# EAGLE board greenhousectrl-latest-shrunkenHBridge (EAGLE 7.7.0)
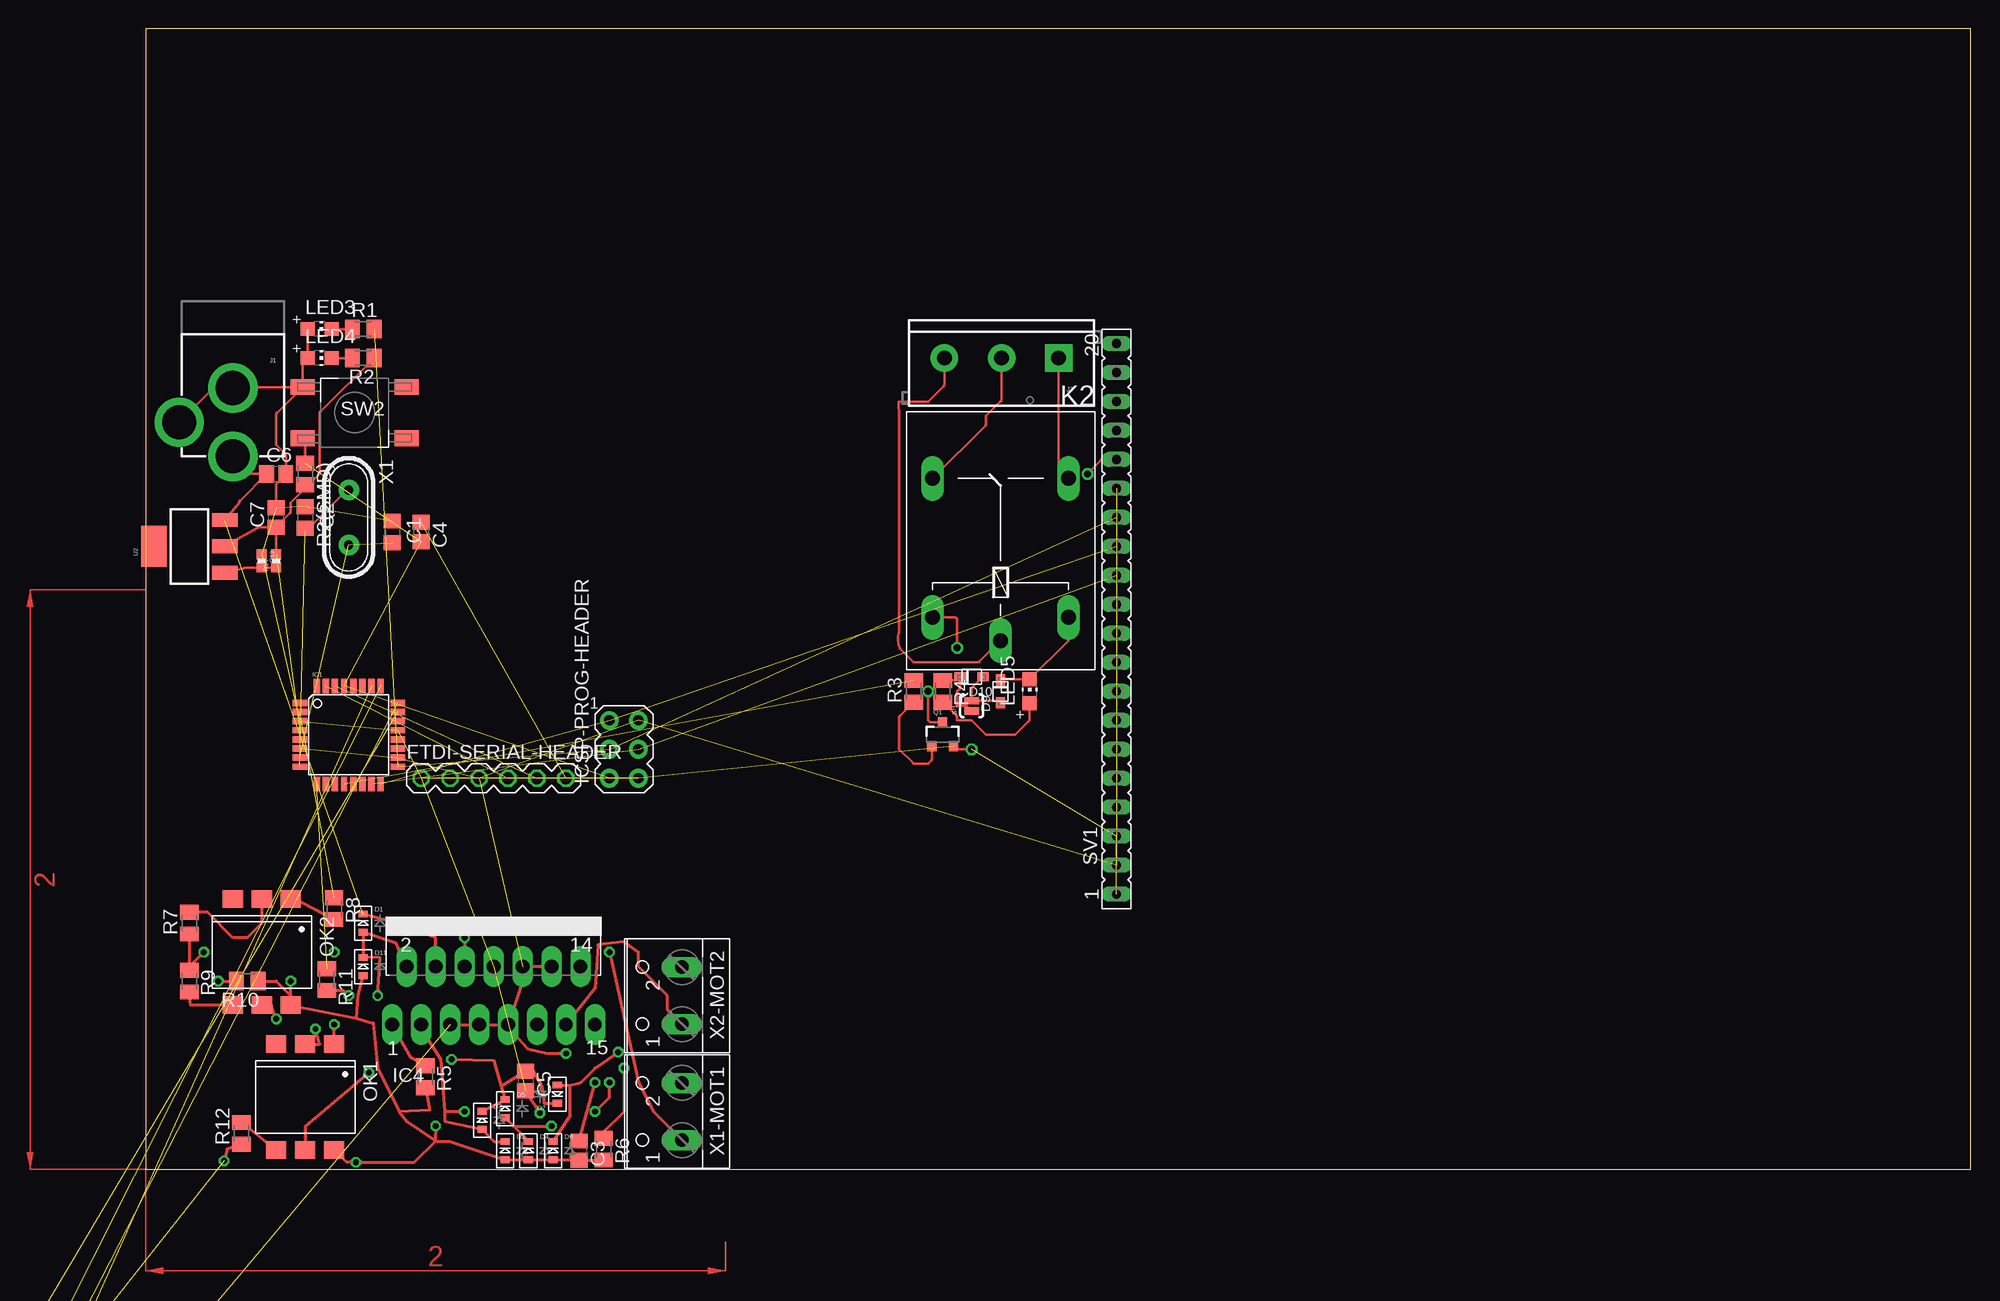
[diagram p0: board, top side]
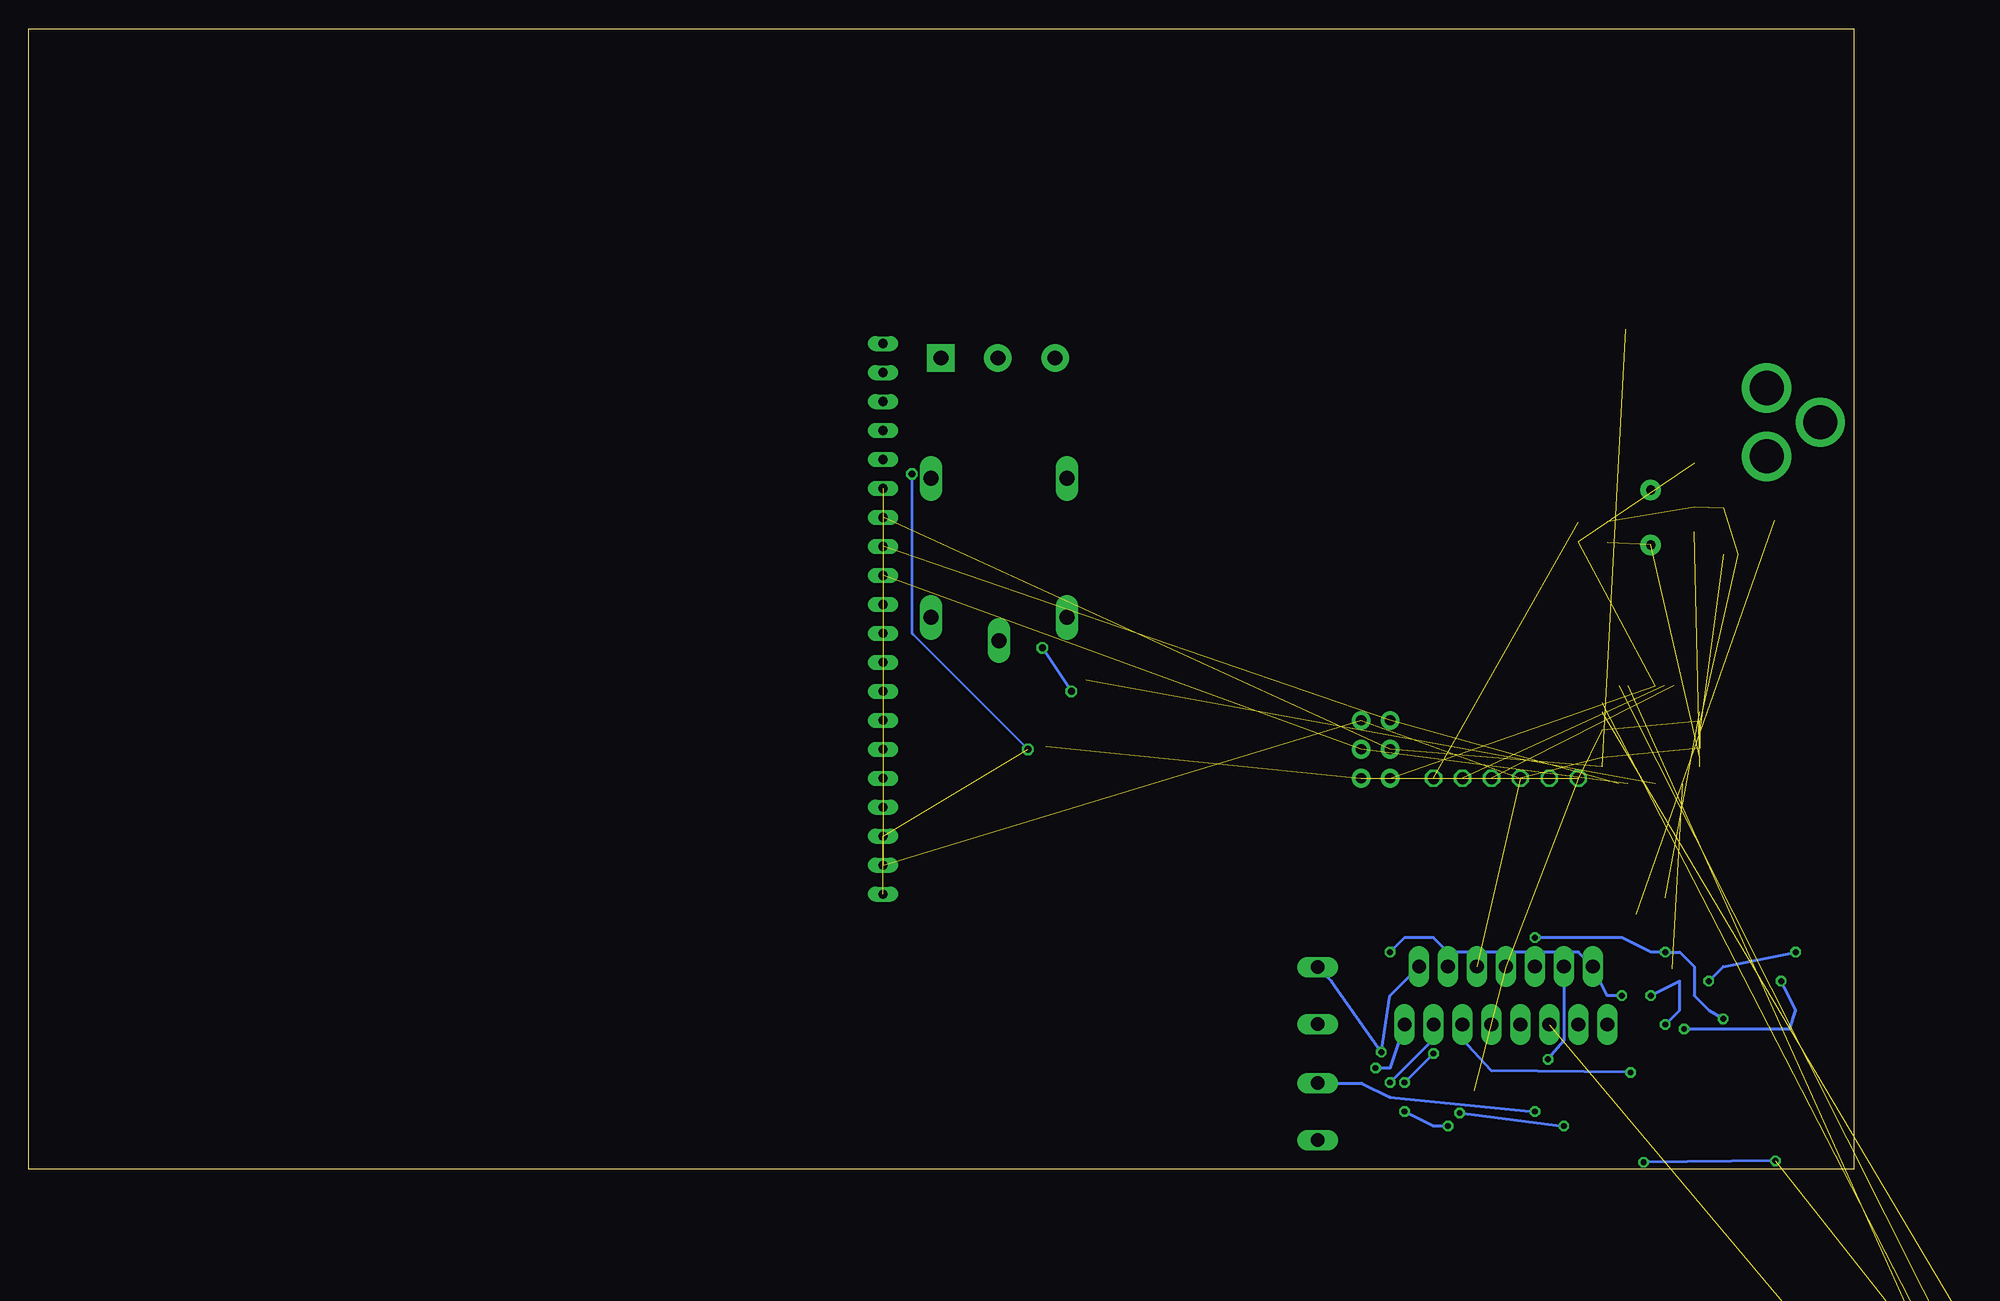
[diagram p1: board, bottom side, seen from below]

Size 160 x 100 mm. Coordinates in mm from the lower left corner, seen from the top.
Outline: 0,0 160,0 160,100 0,100 0,0
Copper layers (1*16): Top 0.035mm / dielectric 1.5mm / Bottom 0.035mm
Design rules "default": minimum track width 10mil, minimum drill 24mil, track to track 8mil, track to pad 8mil, pad to pad 8mil, via to via 8mil, smd to smd 8mil, copper to edge 40mil, drill to drill 8mil, minimum pad ring 10mil, minimum via ring 8mil, stop-mask expansion 4mil, vias tented up to drill 0mil, thermal gap 10mil

## Footprints (pad centres in the part's own frame; a part is rotated, then mirrored left to right if it is on the bottom)
C0805 = smd 1.3 x 1.5: 1 -0.95,0; 2 0.95,0
C0805' = smd 1.3 x 1.5: 1 -0.85,0; 2 0.85,0
SOD-523 = smd 0.8 x 0.6: A 0,-0.8; K 0,0.8
SOD-323F = smd 1 x 0.8: A -1,0; C 1,0
06X1-PTH = drill 1.016 octagon: 1 -6.35,0; 2 -3.81,0; 3 -1.27,0; 4 1.27,0; 5 3.81,0; 6 6.35,0
TQFP32-08 = smd 1.27 x 0.559: 1 -4.293,2.8; 2 -4.293,2; 3 -4.293,1.2; 4 -4.293,0.4; 5 -4.293,-0.4; 6 -4.293,-1.2; 7 -4.293,-2; 8 -4.293,-2.8; 17 4.293,-2.8; 18 4.293,-2; 19 4.293,-1.2; 20 4.293,-0.4; 21 4.293,0.4; 22 4.293,1.2; 23 4.293,2; 24 4.293,2.8 | smd 0.559 x 1.27: 9 -2.8,-4.293; 10 -2,-4.293; 11 -1.2,-4.293; 12 -0.4,-4.293; 13 0.4,-4.293; 14 1.2,-4.293; 15 2,-4.293; 16 2.8,-4.293; 25 2.8,4.293; 26 2,4.293; 27 1.2,4.293; 28 0.4,4.293; 29 -0.4,4.293; 30 -1.2,4.293; 31 -2,4.293; 32 -2.8,4.293
MULTIWATT-15 = drill 1.2 long: 1 -8.89,-7.62; 2 -7.62,-2.54; 3 -6.35,-7.62; 4 -5.08,-2.54; 5 -3.81,-7.62; 6 -2.54,-2.54; 7 -1.27,-7.62; 8 0,-2.54; 9 1.27,-7.62; 10 2.54,-2.54; 11 3.81,-7.62; 12 5.08,-2.54; 13 6.35,-7.62; 14 7.62,-2.54; 15 8.89,-7.62
AVRISP = drill 0.9 pad 1.626: 1 -1.27,2.54; 2 1.27,2.54; 3 -1.27,0; 4 1.27,0; 5 -1.27,-2.54; 6 1.27,-2.54
POWER_JACK_PTH = drill 2.997 pad 4.318: GND 0,7.7; GNDBREAK 4.7,10.7; PWR 0,13.7
SCREWTERMINAL-5MM-3 = drill 1.3 pad 2.413 square: 1 0,0 | drill 1.3 pad 2.413: 2 5,0; 3 10,0
PAD-JUMPER-2-NO_YES_SILK = smd 0.635 x 1.27: 1 -0.45,0; 2 0.45,0
G5LE = drill 1.321 long: 1 -7.493,-5.969; 2 -7.493,5.969; O 4.699,5.969; P -9.525,0; S 4.699,-5.969
CHIP-LED0805 = smd 1.2 x 1.2: A 0,-1.05; C 0,1.05
DIL6-SMD = smd 1.78 x 1.52: 1 -2.54,-4.645; 2 0,-4.645; 3 2.54,-4.645; 4 2.54,4.645; 5 0,4.645; 6 -2.54,4.645
SOT23-3 = smd 0.8 x 0.9: 1 -0.95,-1; 2 0.95,-1; 3 0,1.1
M0805 = smd 1.3 x 1.6: 1 -0.95,0; 2 0.95,0
0402-RES = smd 0.85 x 0.9: 1 -0.58,0; 2 0.58,0
FE20 = drill 0.813 long: 1 -24.13,0; 2 -21.59,0; 3 -19.05,0; 4 -16.51,0; 5 -13.97,0; 6 -11.43,0; 7 -8.89,0; 8 -6.35,0; 9 -3.81,0; 10 -1.27,0; 11 1.27,0; 12 3.81,0; 13 6.35,0; 14 8.89,0; 15 11.43,0; 16 13.97,0; 17 16.51,0; 18 19.05,0; 19 21.59,0; 20 24.13,0
SPST_NO_SMD = smd 2.108 x 1.397: 1 0,4.496; 2 9.119,4.496; 3 0,0; 4 9.119,0
SOT223 = smd 1.219 x 2.235: 1 -2.311,-3.099; 2 0,-3.099; 3 2.311,-3.099 | smd 3.6 x 2.2: 4 0,3.099
HC49 = drill 0.813 pad 1.8: 1 -2.413,0; 2 2.413,0
W237-102 = drill 1.194 long: 1 -2.5,-1.27; 2 2.5,-1.27
W237-103 = drill 1.194 long: 1 -5,-1.29; 2 0,-1.29; 3 5,-1.29

## Placement (x,y rotation side)
C1  [C0805]  21.59,55.88 270 top
C2  [C0805]  13.97,57.15 270 top
C3  1.0uF  [C0805']  37.97,1.65 270 top
C4  0.1uF  [C0805']  24.13,55.88 270 top
C5  1.0uF  [C0805']  33.27,7.75 270 top
C6  0.1uF  [C0805']  11.43,60.96 0 top
C7  0.1uF  [C0805']  11.43,57.15 90 top
D1  [SOD-523]  19.05,21.59 0 top
D2  [SOD-523]  31.5,1.65 0 top
D3  [SOD-523]  29.46,4.32 0 top
D4  [SOD-523]  33.53,1.65 0 top
D5  [SOD-523]  31.5,5.33 0 top
D6  [SOD-523]  35.69,1.65 0 top
D7  [SOD-523]  36.07,6.6 180 top
D9  1N4148  [SOD-323F]  74.93,41.91 90 top
D10  Zener  [SOD-323F]  72.39,43.18 180 top
D11  [SOD-523]  19.05,17.78 0 top
FTDI-SERIAL-HEADER  HEADER-06X1-MALE  [06X1-PTH]  30.48,34.29 0 top
IC1  ATMEGA168TQFP-08  [TQFP32-08]  17.78,38.1 0 top
IC4  L298  [MULTIWATT-15]  30.48,20.32 0 top
ICSP-PROG-HEADER  AVRISP-6  [AVRISP]  41.91,36.83 0 top
J1  POWER_JACKPTH  [POWER_JACK_PTH]  7.62,76.2 180 top
J3  [SCREWTERMINAL-5MM-3]  80.01,71.12 180 top
JP1  JUMPER-PAD-2-NOYES_SILK  [PAD-JUMPER-2-NO_YES_SILK]  72.39,40.64 90 top
K2  G5LE  [G5LE]  74.93,55.88 90 top
LED3  [CHIP-LED0805]  15.24,73.66 270 top
LED4  [CHIP-LED0805]  15.24,71.12 270 top
LED5  [CHIP-LED0805]  77.47,41.91 0 top
OK1  4N27SM  [DIL6-SMD]  13.97,6.35 180 top
OK2  4N27SM  [DIL6-SMD]  10.16,19.05 180 top
Q1  MMBT2222A  [SOT23-3]  69.85,38.1 0 top
R1  [M0805]  19.05,73.66 0 top
R2  [M0805]  19.05,71.12 180 top
R2(SMD)  [M0805]  13.97,60.96 270 top
R3  1K  [M0805]  67.31,41.91 90 top
R4  1K  [M0805]  69.85,41.91 270 top
R5  [M0805]  24.51,8.13 270 top
R6  [M0805]  40.13,1.78 270 top
R7  [M0805]  3.81,21.59 90 top
R8  [M0805]  16.51,22.86 270 top
R9  [M0805]  3.81,16.51 270 top
R10  [M0805]  8.89,16.51 180 top
R11  [M0805]  15.88,16.64 270 top
R12  [M0805]  8.38,3.17 90 top
R13  [0402-RES]  10.16,53.34 270 top
R14  [0402-RES]  11.43,53.34 90 top
SV1  [FE20]  85.09,48.26 90 top
SW2  MOMENTARYBUTTON  [SPST_NO_SMD]  22.86,68.58 180 top
U2  V_REG_317SMD  [SOT223]  3.81,54.61 90 top
X1  CRYSTALS-NOGND-HC49  [HC49]  17.78,57.15 270 top
X1-MOT1  [W237-102]  45.72,5.08 90 top
X2  [W237-103]  -60.96,-90.17 0 top  (outside the outline)
X2-MOT2  [W237-102]  45.72,15.24 90 top
X3  [W237-103]  -60.96,-109.22 0 top  (outside the outline)
X4  [W237-103]  -60.96,-128.27 0 top  (outside the outline)
X5  [W237-103]  -60.96,-147.32 0 top  (outside the outline)

## Library data of the parts
C1 C2 = resistor
C3-C7 D1-D7 D10 D11 ICSP-PROG-HEADER LED3-LED5 R1 R2 R2(SMD) R3-R12 = adafruit
D9 = adafruit; PROD_ID: DIO-08378
FTDI-SERIAL-HEADER = GeekAmmo; OTHER: 4UCON 00834; URL: http://www.4uconnector.com/online/SearchPro.asp?FormName=ProSearch&FormAction=search&s_GroupNo=&s_keyword=00834
IC1 = atmega328p
IC4 = st-microelectronics; MPN: L298N; OC_FARNELL: 1589425; OC_NEWARK: 32M1527
J1 = SparkFun-Connectors; PROD_ID: CONN-08197
J3 = SparkFun-Connectors; PROD_ID: CONN-10134; STOREFRONT_ID: PRT-08433
JP1 = SparkFun-Passives
K2 = relay; OC_FARNELL: unknown; OC_NEWARK: unknown
OK1 OK2 = optocoupler; MF: FAIRCHILD SEMICONDUCTOR; MPN: 4N27S-M; OC_FARNELL: unknown; OC_NEWARK: 05C3300
Q1 = SparkFun-DiscreteSemi; PROD_ID: TRANS-08049
R13 R14 = SparkFun-Resistors
SV1 = con-lsta; OC_FARNELL: unknown; OC_NEWARK: unknown
SW2 = ece388
U2 = SparkFun-PowerIC
X1 = IQD-Frequency-Products
X1-MOT1 X2-MOT2 = con-wago-500; MPN: 237-102; OC_FARNELL: unknown; OC_NEWARK: 70K9898
X2-X5 = ece388; MPN: 237-103; OC_FARNELL: unknown; OC_NEWARK: 18M7116

## Nets
+5V: C3.1 C7.1 FTDI-SERIAL-HEADER.3 IC1.4 IC1.6 IC1.18 IC4.5 IC4.7 IC4.9 IC4.10 IC4.12 ICSP-PROG-HEADER.2 R2(SMD).2 R2.1 R14.2 SV1.2 SV1.15 U2.2 X2.2 X3.2 X4.2 X5.2
+12V: C5.1 C6.1 D1.K D3.K D5.K D7.K IC4.4 J1.PWR U2.3
ADC4: SV1.4
ADC5: SV1.5
COIL: D10.C JP1.1 K2.2 Q1.3 R4.1
COMMON: J3.3 K2.P
CTS(DOESNTEXIST): FTDI-SERIAL-HEADER.2
DIODENODE: D9.A D10.A JP1.2
DTR: C4.1 FTDI-SERIAL-HEADER.6
ENA: IC4.6 OK2.5
ENB: IC4.11 OK1.5
GND: C1.1 C2.1 C3.2 C5.2 C6.2 C7.2 D2.A D4.A D6.A D11.A FTDI-SERIAL-HEADER.1 IC1.3 IC1.5 IC1.21 IC4.8 ICSP-PROG-HEADER.6 J1.GND J1.GNDBREAK LED3.A LED4.A OK1.6 OK2.6 Q1.2 R5.2 R6.2 R7.1 R9.1 R10.1 R12.1 R13.1 SV1.1 SV1.3 SV1.16 SW2.4 X2.1 X3.1 X4.3 X5.3
MISO: IC1.16 ICSP-PROG-HEADER.1 SV1.13
MOSI: IC1.15 ICSP-PROG-HEADER.4 SV1.12
N$1: OK2.1 R8.2
N$2: LED4.C R2.2
N$3: LED5.A R4.2
N$4: OK2.2 R7.2
N$5: OK2.4 R9.2
N$6: Q1.1 R3.1
N$7: R13.2 R14.1 U2.1
N$8: OK1.1 R11.2
N$9: OK1.2 R10.2
N$10: LED3.C R1.1
N$11: C1.2 IC1.7 X1.2
N$13: C2.2 IC1.8 X1.1
N$15: OK1.4 R12.2
NC: J3.1 K2.S
NO: J3.2 K2.O
OUT1: D1.A D11.K IC4.2 X1-MOT1.1
OUT2: D2.K D3.A IC4.3 X1-MOT1.2
OUT3: D4.K D5.A IC4.13 X2-MOT2.1
OUT4: D6.K D7.A IC4.14 X2-MOT2.2
PB0: IC1.12 R3.2
PB1: IC1.13
PB2: IC1.14
PC0: IC1.23 X2.3
PC1: IC1.24 X3.3
PC2: IC1.25 X4.1
PC3: IC1.26 X5.1
PC4: IC1.27
PC5: IC1.28
PD2: IC1.32
PD3: IC1.1
PD4: IC1.2 R8.1
PD5: IC1.9 R11.1
PD6: IC1.10
PD7: IC1.11
RST: C4.2 IC1.29 ICSP-PROG-HEADER.5 R2(SMD).1 SW2.2
RX: FTDI-SERIAL-HEADER.5 IC1.30
SCK: IC1.17 ICSP-PROG-HEADER.3 R1.2 SV1.14
SEN_A: IC4.1 R5.1
SEN_B: IC4.15 R6.1
SS: SV1.11
TX: FTDI-SERIAL-HEADER.4 IC1.31
VCC: D9.C K2.1 LED5.C

## Tracks (layer width: path | path; a pad name or v marks a point on that pad's centre or on a via)
+5V  (via drill 0.51)  (12 unrouted)
  Top 0.203: U2.2 9.79,56.23 arc-45 9.97,56.3 C7.1 | C7.1 12.63,57.5 arc45 12.7,57.67 12.7,58.42 13.9,59.62 arc45 13.97,59.8 R2(SMD).2 14.19,60.01 arc45 14.36,60.08 15.24,60.96 15.24,66.25 arc-45 15.31,66.43 R2.1 | C7.1 R14.2
  Top 0.254: C3.1 v39.37,7.62 | v36.83,10.16 35.18,10.16 33.53,10.54 32.26,11.94 IC4.9 | IC4.9 33.02,16.51 IC4.10 IC4.12 | IC4.9 IC4.7 IC4.5
  Bottom 0.254: v39.37,7.62 v36.83,10.16
+12V  (via drill 0.51)  (1 unrouted)
  Top 0.203: J1.PWR 9.09,61.03 arc45 9.27,60.96 C6.1 8.25,58.63 arc45 8.18,58.45 U2.3
  Top 0.254: IC4.4 25.4,20.32 22.06,21.59 D1.K | v26.8,9.65 30.48,9.56 31.11,7.43 | 31.11,7.43 D5.K D3.K | D7.K 34.92,5.8 34.67,7.37 33.95,8.64 C5.1 31.22,7.33 31.11,7.43
  Bottom 0.254: IC4.4 25.4,11.3 v26.8,9.65
COIL  (via drill 0.6)
  Top 0.203: K2.2 70.89,48.39 arc-45 71.07,48.31 71.12,48.26 v71.12,45.72 | v68.58,41.91 68.8,41.91 | 68.8,41.91 arc45 68.97,41.98 R4.1 70.97,42.86 arc45 71.14,42.93 D10.C 71.39,42.28 arc-45 71.32,42.11 71.12,41.91 71.12,40.64 71.83,40.64 arc-45 72.01,40.57 JP1.1 | 68.8,41.91 68.65,41.77 arc45 68.58,41.59 68.58,39.37 68.68,39.27 arc45 68.86,39.2 Q1.3
  Bottom 0.203: v71.12,45.72 v68.58,41.91
COMMON
  Top 0.203: J3.3 70.01,68.84 arc-45 69.94,68.67 68.58,67.31 66.14,67.31 arc45 65.97,67.24 66.04,66.04 66.04,47.09 arc45 66.11,45.65 67.31,44.45 72.92,44.45 arc45 73.1,44.52 K2.P
DIODENODE
  Top 0.203: D9.A 74.82,41.02 arc45 74.64,41.09 JP1.2 72.39,42.08 arc-45 72.46,42.25 D10.A
DTR  (1 unrouted)
ENA  (via drill 0.51)
  Top 0.254: v27.94,20.32 IC4.6 | v11.43,13.21 10.99,14.4 OK2.5
  Bottom 0.254: v27.94,20.32 20.32,20.32 17.78,19.05 v16.51,19.05 15.24,19.05 13.97,17.78 13.97,15.24 12.7,13.97 v11.43,13.21
ENB  (via drill 0.51)
  Top 0.254: v19.56,8.51 13.97,3.81 OK1.5
  Bottom 0.254: v19.56,8.51 31.75,8.64 34.29,11.43 IC4.11
GND  (via drill 0.51, 0.6)  (17 unrouted)
  Top 0.203: Q1.2 71,36.9 arc45 71.17,36.83 v72.39,36.83 | v82.55,60.96 83.75,62.16 arc-45 83.92,62.23 SV1.16 | C7.2 11.43,60.01 arc-45 11.5,60.18 C6.2 12.28,62.55 arc45 12.21,62.72 11.43,63.5 11.43,66.16 arc-45 11.5,66.34 SW2.4 | J1.GNDBREAK 5.85,68.43 arc-45 6.03,68.5 J1.GND J1.GND arc-45 7.8,68.58 SW2.4 | LED3.A LED4.A 13.82,70.75 arc45 13.74,70.57 SW2.4
  Top 0.254: R7.1 3.81,17.78 | 3.81,17.78 R9.1 | 22.22,5.07 20.32,8.89 19.94,12.83 18.49,13.26 | 22.22,5.07 22.9,4.19 25.34,2.5 | 25.34,2.5 25.4,2.5 | 25.4,2.5 26.64,2.46 D2.A D4.A D6.A 37.92,0.85 C3.2 40.1,0.8 R6.2 | 18.49,13.26 OK2.6 12.7,15.24 | 18.49,13.26 18.61,15.28 D11.A | 12.7,15.24 v12.7,16.51 | v5.08,19.05 3.81,17.78 | C5.2 33.66,6.35 v34.54,4.95 | R5.2 24.89,5.2 22.22,5.07 | v25.4,3.81 25.38,3.81 25.34,2.5 | R12.1 7.11,1.78 v6.86,0.76 | OK1.6 17.58,0.64 v18.41,0.64 23.54,0.64 25.4,2.5 | R10.1 11.43,16.51 12.7,15.24
  Bottom 0.203: v72.39,36.83 82.48,46.92 arc45 82.55,47.09 v82.55,60.96
  Bottom 0.254: v12.7,16.51 11.43,17.78 v5.08,19.05 | v34.54,4.95 v25.4,3.81 | v6.86,0.76 v18.41,0.64
MISO  (2 unrouted)
MOSI  (2 unrouted)
N$1
  Top 0.254: R8.2 12.81,23.81 OK2.1
N$2
  Top 0.203: LED4.C R2.2
N$3
  Top 0.203: R4.2 71.05,39.76 arc-45 71.12,39.59 71.12,39.37 72.39,39.37 73.66,38.1 76.2,38.1 77.4,39.3 arc45 77.47,39.48 LED5.A
N$4
  Top 0.254: OK2.2 10.16,21.59 8.89,20.32 7.62,20.32 5.4,22.54 R7.2
N$5
  Top 0.254: OK2.4 3.92,14.4 R9.2
N$6
  Top 0.203: R3.1 66.11,39.76 arc45 66.04,39.59 66.04,36.83 67.24,35.63 arc45 67.42,35.56 68.58,35.56 68.83,35.81 arc45 68.9,35.98 Q1.1
N$7
  Top 0.203: U2.1 8.57,52.69 arc-45 8.74,52.76 R13.2 R14.1
N$8  (via drill 0.51)
  Top 0.254: OK1.1 v16.51,12.7 | v17.78,15.24 17.33,15.69 R11.2
  Bottom 0.254: v16.51,12.7 15.24,13.97 15.24,16.51 v17.78,15.24
N$9  (via drill 0.51)
  Top 0.203: R10.2 7.69,16.26 arc45 7.62,16.09
  Top 0.254: OK1.2 15.24,10.99 v14.86,12.32 | v6.35,16.51 R10.2
  Bottom 0.254: v14.86,12.32 5.59,12.32 5.08,13.97 v6.35,16.51
N$10
  Top 0.203: LED3.C R1.1
N$11  (2 unrouted)
N$13  (1 unrouted)
  Top 0.203: C2.2 13.97,55.88 17.58,59.49 arc-45 17.76,59.56 X1.1
N$15
  Top 0.203: OK1.4 R12.2
NC
  Top 0.203: J3.1 80.01,61.57 arc45 80.08,61.39 K2.S
NO
  Top 0.203: J3.2 75.01,67.5 arc-45 74.94,67.32 73.66,66.04 73.66,65.38 arc-45 73.59,65.2 K2.O
OUT1  (via drill 0.51)
  Top 0.254: IC4.2 21.93,19.81 D1.A D11.K 20.54,18.54 v20.32,15.24 | v40.64,19.05 43.18,7.62 44.49,5.08 X1-MOT1.1
  Bottom 0.254: v20.32,15.24 21.59,15.24 IC4.2 24.13,19.05 35.56,19.05 36.83,20.32 39.37,20.32 v40.64,19.05
OUT2  (via drill 0.51)
  Top 0.254: IC4.3 25.02,10.96 25.82,9.65 26.2,5.08 | D2.K 30.53,2.45 D3.A 26.2,4.24 26.2,5.08 | v27.94,5.08 26.2,5.08
  Bottom 0.254: X1-MOT1.2 43.14,7.58 40.64,6.35 v27.94,5.08
OUT3  (via drill 0.51)
  Top 0.254: D4.K 33.53,2.5 D5.A 32.22,3.81 v35.56,3.81 | X2-MOT2.1 45.76,13.97 45.72,13.97 45.72,15.24 43.18,17.78 43.18,19.05 41.91,19.94 39.62,19.68 39.37,15.88 IC4.13 | v39.37,5.08 40.64,6.35 v40.64,7.62
  Bottom 0.254: v35.56,3.81 36.83,3.81 v39.37,5.08 | v40.64,7.62 36.83,11.43 IC4.13
OUT4  (via drill 0.51)
  Top 0.254: v41.4,10.29 39.37,8.89 38.1,7.62 37.21,7.37 | D6.K 37.21,4.7 37.21,7.37 | D7.A 36.11,7.37 37.21,7.37
  Bottom 0.254: 48.3,17.82 X2-MOT2.2 45.76,16.51 v41.4,10.29 40.64,15.24 IC4.14
PB0  (1 unrouted)
PC0  (1 unrouted)
PC1  (1 unrouted)
PC2  (1 unrouted)
PC3  (1 unrouted)
PD4  (1 unrouted)
PD5  (1 unrouted)
RST  (3 unrouted)
  Top 0.203: SW2.2 13.9,63.93 arc-45 13.97,63.75 R2(SMD).1
RX  (1 unrouted)
SCK  (3 unrouted)
SEN_A
  Top 0.254: R5.1 23.24,9.78 IC4.1
SEN_B  (via drill 0.51)
  Top 0.254: v41.91,8.89 41.91,5.08 40.13,3.3 R6.1
  Bottom 0.254: IC4.15 40.64,8.89 v41.91,8.89
TX  (1 unrouted)
VCC
  Top 0.203: K2.1 80.9,46.49 arc-45 80.83,46.31 LED5.C 75.05,42.96 arc45 D9.C
(copper drawn outside any net)
  shapes: Top area x2